# Altium PCB AirQ.PcbDoc
Units mm, origin at the board's own origin, x right, y up, seen from the top; angles counter-clockwise.
Board outline 40 x 27 mm, 2 copper layers (Top Layer, Bottom Layer); 53 components, 41 nets, 204 pads, 58 vias.
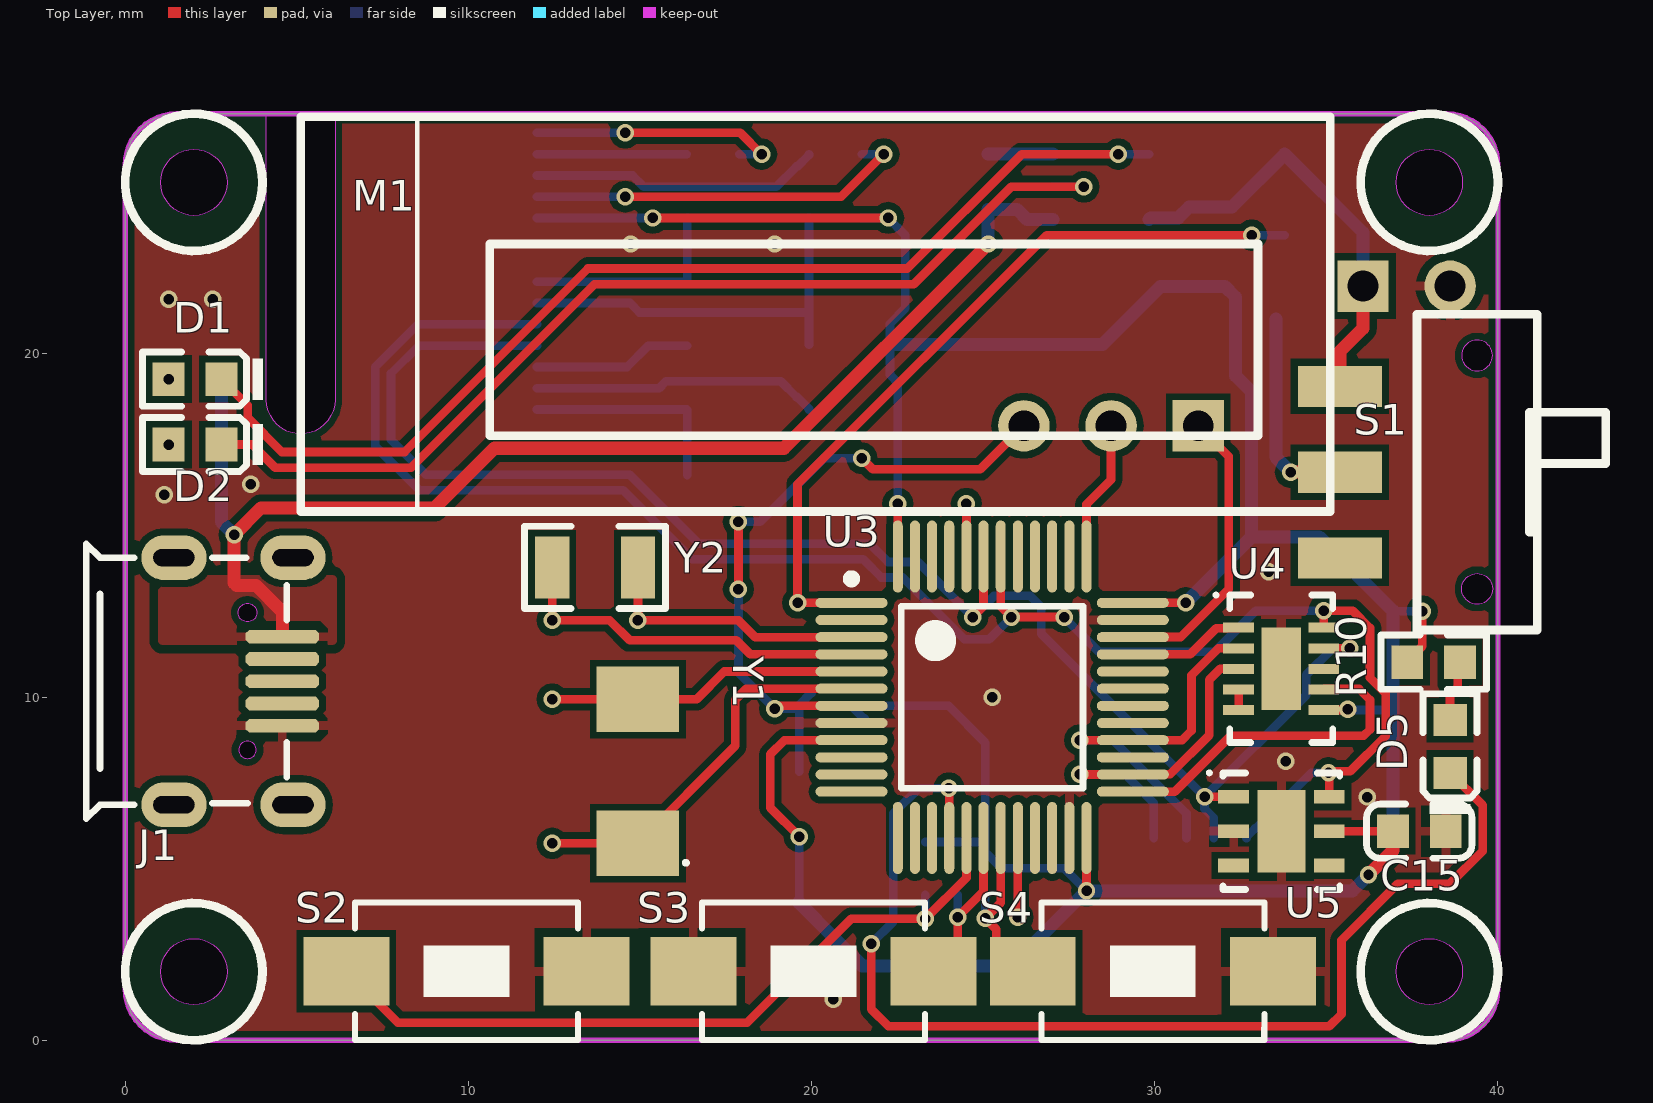
[diagram p0: Top Layer view]
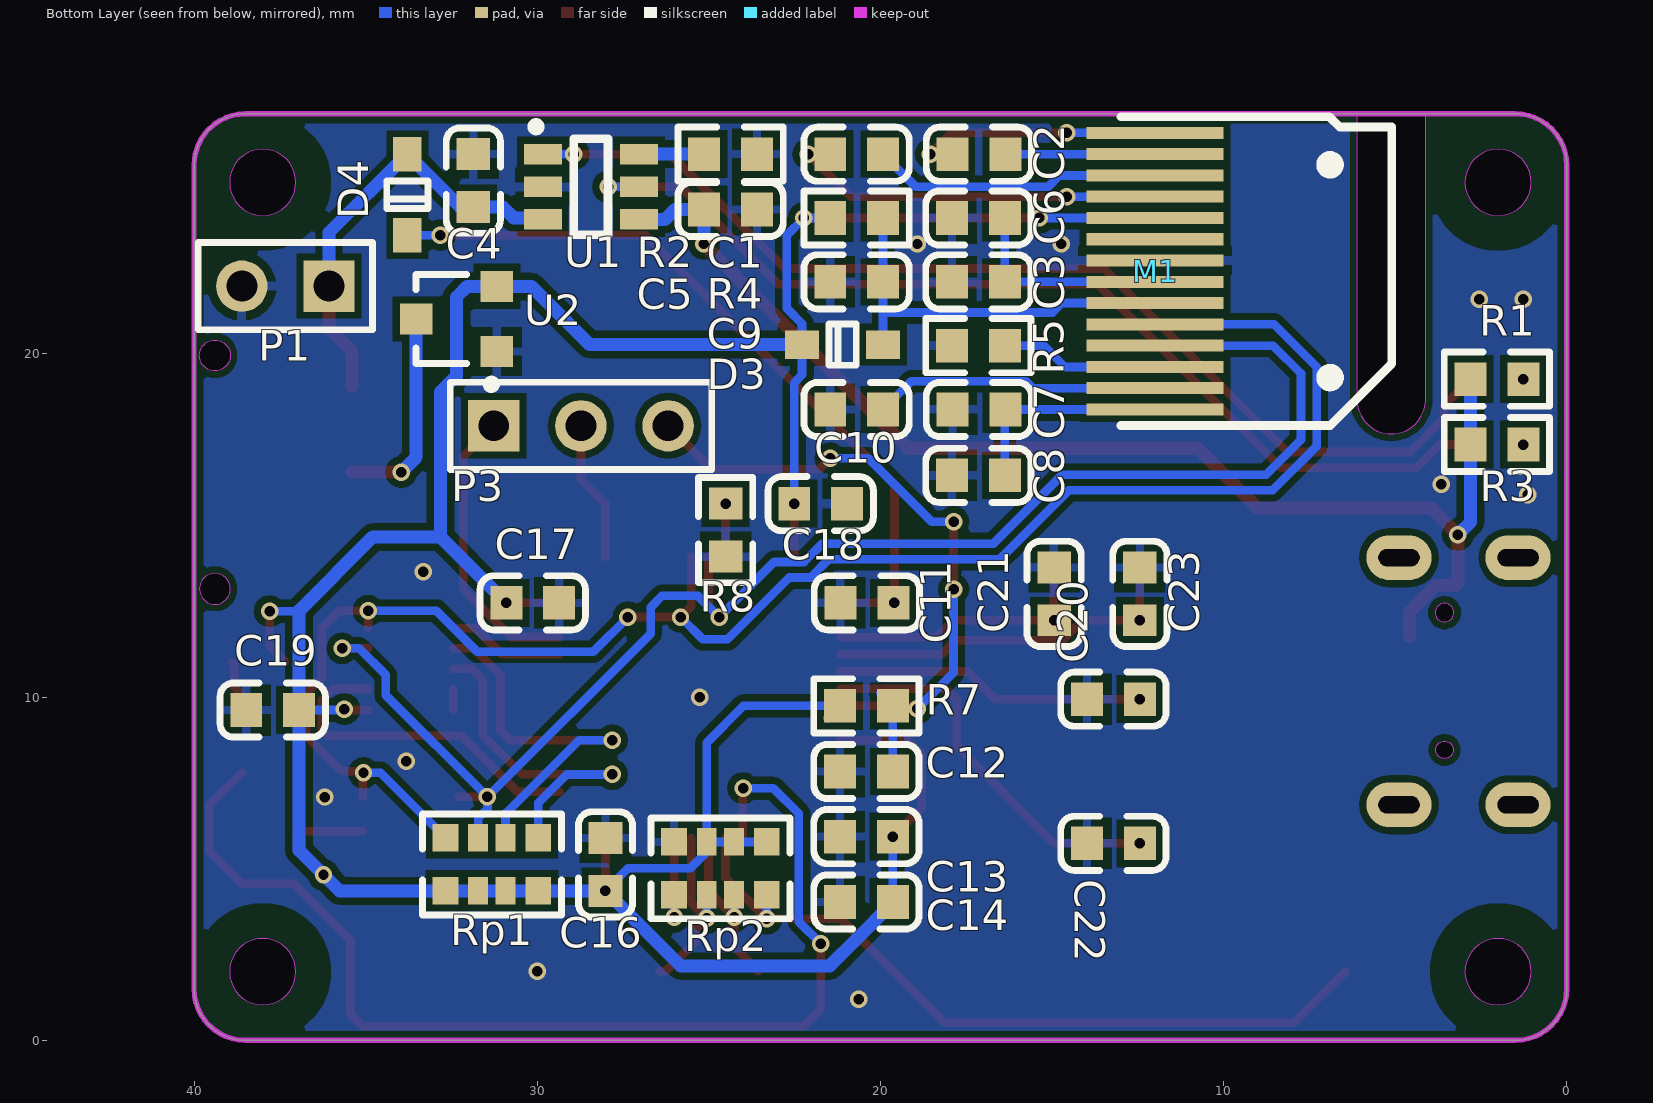
[diagram p1: Bottom Layer view, seen from below]
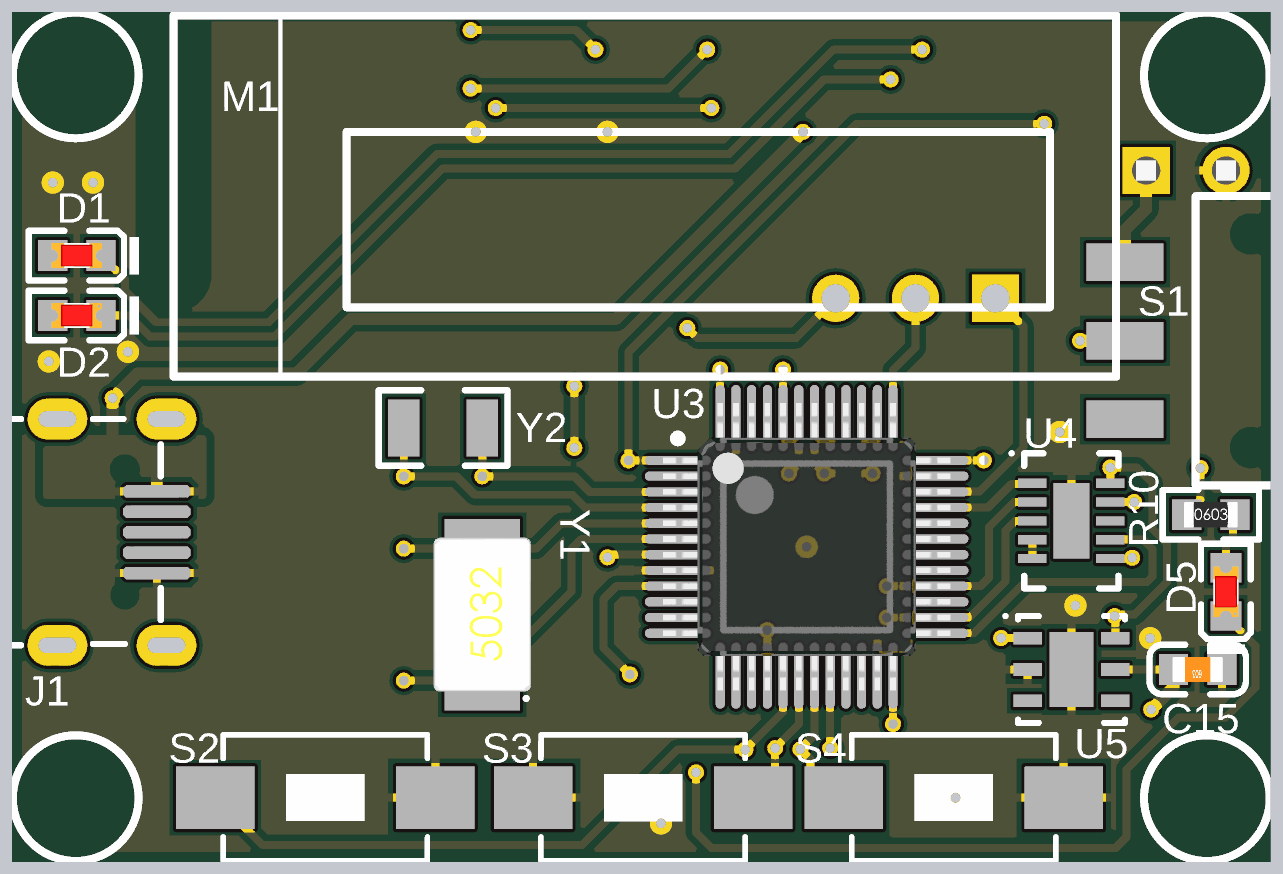
[diagram p2: 3D render of the assembled board from above, using the file's embedded part models]
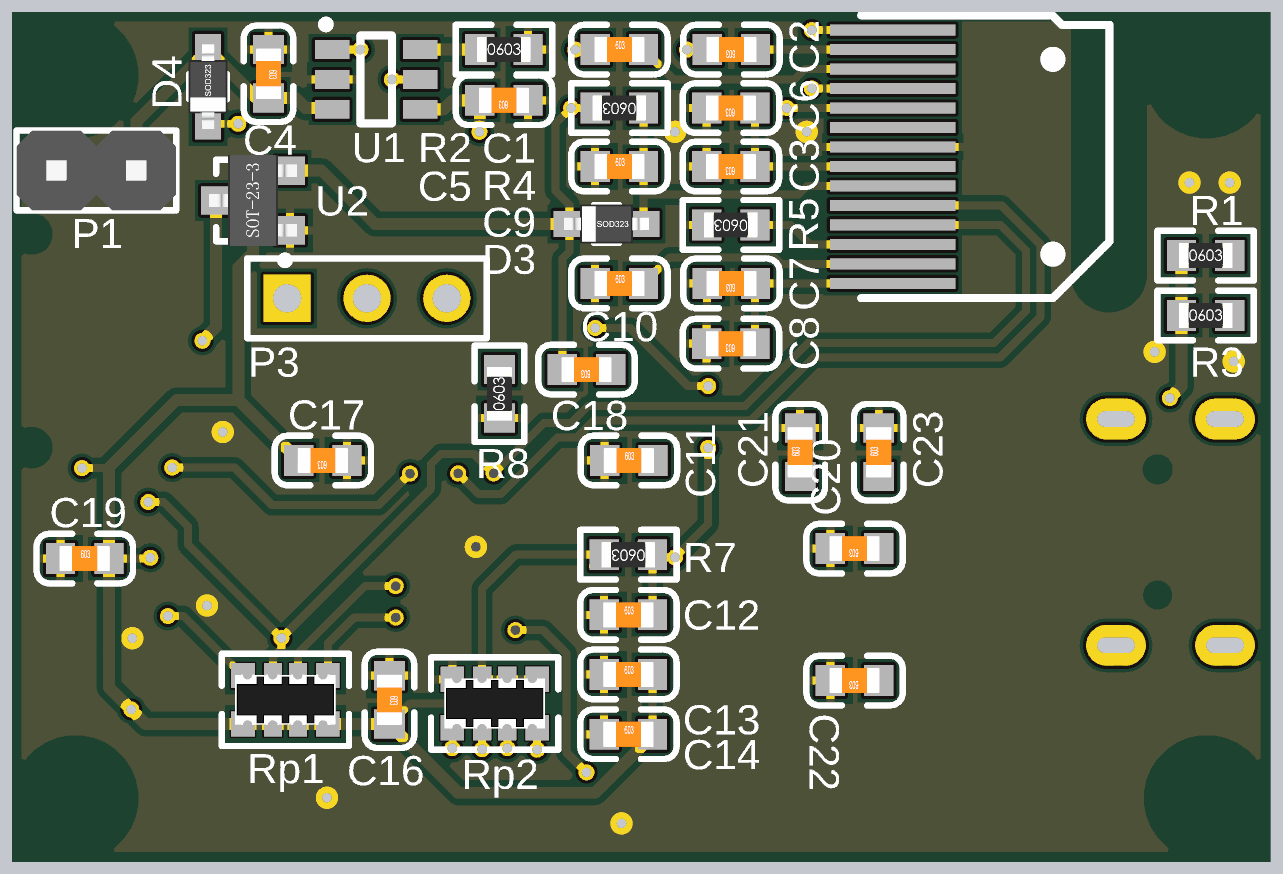
[diagram p3: 3D render of the assembled board from below, using the file's embedded part models]

## Layer stack, top to bottom
Top Solder: solder mask 0.0102, Solder Resist, Dk 3.5
Top Layer: signal copper 0.0356
Dielectric 1: dielectric 0.32, FR-4, Dk 4.8
Bottom Layer: signal copper 0.0356
Bottom Solder: solder mask 0.0102, Solder Resist, Dk 3.5

## Board outline
0,1.5 ccw(c1.5,1.5) 1.5,0 38.5,0 ccw(c38.5,1.5) 40,1.5 40,25.5 ccw(c38.5,25.5) 38.5,27 1.5,27 ccw(c1.5,25.5) 0,25.5
cut-out: 38,1.034 cw(c38,2) 37.034,2 cw(c38,2) 38,2.966 cw(c38,2) 38.966,2 cw(c38,2)
cut-out: 38,24.034 cw(c38,25) 37.034,25 cw(c38,25) 38,25.966 cw(c38,25) 38.966,25 cw(c38,25)
cut-out: 2,24.034 cw(c2,25) 1.034,25 cw(c2,25) 2,25.966 cw(c2,25) 2.966,25 cw(c2,25)
cut-out: 2,1.034 cw(c2,2) 1.034,2 cw(c2,2) 2,2.966 cw(c2,2) 2.966,2 cw(c2,2)
cut-out: 4.114,18.669 4.114,27 6.114,27 6.114,18.669 cw(c5.114,18.669)

## Design rules (kind name [scope] priority, off if disabled: settings)
Clearance "Schematic Clearance Constraint" [InComponent('J1')] p1: gap=0.203 ignorepadtopadclearanceinfootprint=FALSE
Clearance [All] p2: gap=0.203 ignorepadtopadclearanceinfootprint=FALSE
PolygonConnect PolygonConnect_VIA [IsVia] p1: connectstyle=Direct reliefconductorwidth=0.254 reliefentries=4 polygonreliefangle="90 Angle" airgapwidth=0.254
PolygonConnect [All] p2: connectstyle=Relief reliefconductorwidth=0.254 reliefentries=4 polygonreliefangle="90 Angle" airgapwidth=0.254
RoutingVias [All] p1: holewidth=0.711 width=1.27 viastyle="Through Hole" minholewidth=0.305 minwidth=0.508 maxholewidth=0.711 maxwidth=1.27
SolderMaskExpansion [All] p1: expansion=0.102
Width "Schematic Width Constraint" [InComponent('J1')] p1: maxlimit=0.762 minlimit=0.381 preferedwidth=0.508
Width [All] p2: maxlimit=0.762 minlimit=0.254 preferedwidth=0.381
30 further rules are at their usual default settings.

## Classes and differential pairs
net class Power: +5

## Components (designator, comment, footprint, x,y, rotation, side; value= is the part's Value field where it differs from the comment)
C1 "1uF (105) 10% 50V" 0603_C 20.693,25.822 r180 bottom
C2 "1uF (105) 10% 50V" 0603_C 17.129,25.822 r0 bottom
C3 "4.7uF (475) 10% 16V" 0603_C 17.145,22.102 r0 bottom
C4 "10uF (106) 10% 10V" 0603_C 31.861,25.052 r270 bottom
C5 "1uF (105) 10% 50V" 0603_C 24.368,24.209 r0 bottom
C6 "100nF (104) 10% 50V" 0603_C 17.145,23.962 r0 bottom
C7 "4.7uF (475) 10% 16V" 0603_C 17.129,18.382 r0 bottom
C8 "100nF (104) 10% 50V" 0603_C 17.145,16.462 r0 bottom
C9 "4.7uF (475) 10% 16V" 0603_C 20.693,22.102 r180 bottom
C10 "2.2uF (225) 10% 16V" 0603_C 20.693,18.382 r180 bottom
C11 "100nF (104) 10% 50V" 0603_C 20.392,12.747 r180 bottom
C12 "100nF (104) 10% 50V" 0603_C 20.408,7.834 r180 bottom
C13 "100nF (104) 10% 50V" 0603_C 20.408,5.937 r180 bottom
C14 "2.2uF (225) 10% 16V" 0603_C 20.408,4.032 r180 bottom
C15 "4.7uF (475) 10% 16V" 0603_C 37.708,6.094 r180 top
C16 "100nF (104) 10% 50V" 0603_C 28.012,5.127 r270 bottom
C17 "100nF (104) 10% 50V" 0603_C 30.132,12.747 r0 bottom
C18 "100nF (104) 10% 50V" 0603_C 21.742,15.637 r0 bottom
C19 "1uF (105) 10% 50V" 0603_C 37.708,9.624 r180 bottom
C20 "22pF (220) 5% 50V" 0603_C 13.21,9.94 r0 bottom
C21 "22pF (220) 5% 50V" 0603_C 14.94,13.009 r90 bottom
C22 "22pF (220) 5% 50V" 0603_C 13.21,5.74 r0 bottom
C23 "22pF (220) 5% 50V" 0603_C 12.44,13.009 r90 bottom
D1 "红灯 0603" 0603_LED_S1 2.037,19.265 r180 top
D2 "绿灯 0603" 0603_LED_S1 2.037,17.36 r180 top
D3 "1N4148WS T4" SOD-323 21.103,20.272 r180 bottom
D4 "1N4148WS T4" SOD-323 33.786,24.642 r90 bottom
D5 "蓝灯 0603" 0603_LED_S1 38.605,8.564 r90 top
J1 "USB_M" USB-MICRO-A01SB141B1-261 2.039,10.463 r270 top
M1 "OLED 0.91" "OLED 0.91 BOTTOM" 11.997,22.412 r0 top
P1 "Header 2" HDR2X1-2.54 36.068,21.975 r0 bottom
P3 "Header 3" HDR3X1-2.54-1 31.267,17.907 r180 bottom
R1 "10KΩ (1002) ±1%" 0603_R 2.037,19.265 r180 bottom
R2 "1.5KΩ (1501) ±1%" 0603_R 24.368,25.822 r180 bottom
R3 "10KΩ (1002) ±1%" 0603_R 2.037,17.36 r180 bottom
R4 "4.7KΩ (4701) ±1%" 0603_R 20.693,23.962 r0 bottom
R5 "560KΩ (5603) ±1%" 0603_R 17.145,20.242 r0 bottom
R7 "10KΩ (1002) ±1%" 0603_R 20.408,9.747 r0 bottom
R8 "10KΩ (1002) ±1%" 0603_R 24.512,14.867 r90 bottom
R10 "10KΩ (1002) ±1%" 0603_R 38.126,11.019 r0 top
Rp1 "10KΩ (103) ±5%" 0603_Rx4 31.322,5.127 r0 bottom
Rp2 "10KΩ (103) ±5%" 0603_Rx4 24.662,5.011 r0 bottom
S1 "SW-SPDT" SWITCH_SMT1 35.392,16.555 r0 top
S2 "SW-PB" SW_PB2_A1 10,2.013 r90 top
S3 "SW-PB" SW_PB2_A1 20,2.013 r270 top
S4 "SW-PB" SW_PB2_A1 30,2.013 r90 top
U1 "TP4057" SOT-23-6 28.435,24.872 r0 bottom
U2 "662K" SOT23-3 32.353,21.019 r90 bottom
U3 "STM32F103C" LQFP-48 25.261,9.997 r0 top
U4 "CCS811" CCS811 33.685,10.824 r0 top
U5 "HDC1080" HDC1080 33.69,6.094 r0 top
Y1 "XTAL" "5032 - 2Pin" 14.94,7.84 r90 top value=8M
Y2 "32.768KHz ±20ppm 12.5pF" "SMD-3215_2P FC - 135" 13.69,13.779 r0 top

## Footprints (in the part's own frame and the unit in brackets; to place one, negate y for a bottom-side part, rotate by r counter-clockwise, add the part's x,y. Pads: shape width x height; smd on the part's side, far side on the other; paste and mask are expansions set on the pad)
0603_C [mm]
  rect 0.93x0.98 smd: 1(-0.77,0) 2(0.77,0)
  silkscreen extent -1.53,-0.79 1.54,0.79, body extent -0.8,-0.4 0.8,0.4, height 0.3
0603_LED_S1 [mm]
  rect 0.93x0.98 smd: A(0.77,0) K(-0.77,0)
  silkscreen extent -1.98,-0.79 1.54,0.79, body extent -0.8,-0.4 0.8,0.4, height 0.6
0603_R [mm]
  rect 0.93x0.98 smd: 1(-0.77,0) 2(0.77,0)
  silkscreen extent -1.53,-0.79 1.54,0.79, body extent -0.85,-0.4 0.85,0.4, height 0.56
0603_Rx4 [mm]
  rect 0.75x0.8 smd mask+0.051: 1(-1.35,-0.77) 4(1.35,-0.77) 5(1.35,0.77) 8(-1.35,0.77)
  rect 0.58x0.8 smd mask+0.051: 2(-0.4,-0.77) 3(0.4,-0.77) 6(0.4,0.77) 7(-0.4,0.77)
  silkscreen extent -2.02,-1.47 2.02,1.47, body extent -1.6,-0.8 1.6,0.8, height 0.55
"5032 - 2Pin" [mm] "无源晶振"
  rect 1.9x2.4 smd: 1(-2.1,0) 2(2.1,0)
  silkscreen extent -2.72,-1.45 -2.62,-1.35, body extent -2.45,-1.55 2.45,1.55, height 0.85
CCS811 [mm] "空气质量传感器"
  rect 0.9x0.292 smd: 1(-1.24,1.2) 2(-1.24,0.6) 3(-1.24,0) 4(-1.24,-0.6) 5(-1.24,-1.2) 6(1.24,-1.2) 7(1.24,-0.6) 8(1.24,0) 9(1.24,0.6) 10(1.24,1.2)
  rect 1.143x2.4 smd: 11(0,0)
  silkscreen extent -1.95,-2.15 1.5,2.2, body extent -1.35,-2 1.35,2, height 1.1
HDC1080 [mm] "温湿度传感器"
  rect 0.9x0.4 smd: 1(-1.395,1) 2(-1.395,0) 3(-1.395,-1) 4(1.395,-1) 5(1.395,0) 6(1.395,1)
  rect 1.397x2.4 smd: 7(0,0)
  silkscreen extent -2.15,-1.7 1.7,1.75, body extent -1.55,-1.55 1.55,1.55, height 0.8
HDR2X1-2.54 [mm] "2.54单排针排座"
  rect 1.5x1.5 hole 0.9: 1(0,0)
  round 1.5 hole 0.9: 2(2.54,0)
  silkscreen extent -1.27,-1.27 3.81,1.27, body extent -1.27,-1.27 3.81,1.27, height 8.54
HDR3X1-2.54-1 [mm] "2.54单排针排座"
  rect 1.5x1.5 hole 0.9: 1(0,0)
  round 1.5 hole 0.9: 2(2.54,0) 3(5.08,0)
  silkscreen extent -1.27,-1.27 6.35,1.27
LQFP-48 [mm] "LQFP"
  oval 2.1x0.292 smd: 1(-4.1,2.75) 2(-4.1,2.25) 3(-4.1,1.75) 4(-4.1,1.25) 5(-4.1,0.75) 6(-4.1,0.25) 7(-4.1,-0.25) 8(-4.1,-0.75) 9(-4.1,-1.25) 10(-4.1,-1.75) 11(-4.1,-2.25) 12(-4.1,-2.75) 25(4.1,-2.75) 26(4.1,-2.25) 27(4.1,-1.75) 28(4.1,-1.25) 29(4.1,-0.75) 30(4.1,-0.25) 31(4.1,0.25) 32(4.1,0.75) 33(4.1,1.25) 34(4.1,1.75) 35(4.1,2.25) 36(4.1,2.75)
  oval 0.292x2.1 smd: 13(-2.75,-4.1) 14(-2.25,-4.1) 15(-1.75,-4.1) 16(-1.25,-4.1) 17(-0.75,-4.1) 18(-0.25,-4.1) 19(0.25,-4.1) 20(0.75,-4.1) 21(1.25,-4.1) 22(1.75,-4.1) 23(2.25,-4.1) 24(2.75,-4.1) 37(2.75,4.1) 38(2.25,4.1) 39(1.75,4.1) 40(1.25,4.1) 41(0.75,4.1) 42(0.25,4.1) 43(-0.25,4.1) 44(-0.75,4.1) 45(-1.25,4.1) 46(-1.75,4.1) 47(-2.25,4.1) 48(-2.75,4.1)
  silkscreen extent -4.22,-2.65 2.65,3.57, body extent -4.57,-4.57 4.57,4.57, height 1.62
"OLED 0.91 BOTTOM" [mm] "0.91寸OLED,反面焊盘"
  rect 4x0.35 smd far side: 1(0,4.03) 2(0,3.41) 3(0,2.79) 4(0,2.17) 5(0,1.55) 6(0,0.93) 7(0,0.31) 8(0,-0.31) 9(0,-0.93) 10(0,-1.55) 11(0,-2.17) 12(0,-2.79) 13(0,-3.41) 14(0,-4.03)
  silkscreen extent -6.88,-7 23.12,4.5, body extent -7.24,-7 23.12,4.5, height 0.25
"SMD-3215_2P FC - 135" [mm]
  rect 1x1.8 smd: 1(-1.25,0) 2(1.25,0)
  silkscreen extent -2.05,-1.2 2.05,1.2
SOD-323 [mm]
  rect 1x0.83 smd: 1(1.18,0) 2(-1.18,0)
  silkscreen extent -0.4,-0.6 0.4,0.6, body extent -1.35,-0.63 1.35,0.63, height 1.1
SOT23-3 [mm]
  rect 0.9x0.95 smd: 1(-0.95,-1.175) 2(0.95,-1.175) 3(0,1.175)
  silkscreen extent -2.03,-1.14 1.3,1.18, body extent -1.45,-1.4 1.45,1.4, height 1.2
SOT-23-6 [mm]
  rect 1.1x0.6 smd: 1(1.4,-0.95) 2(1.4,0) 3(1.4,0.95) 4(-1.4,0.95) 5(-1.4,0) 6(-1.4,-0.95)
  silkscreen extent -0.5,-1.87 1.73,1.4
SW_PB2_A1 [mm]
  rect 2x2.5 smd: 1(0,3.556) 2(0,-3.444)
  silkscreen extent -2,-3.19 2,3.31, body extent -1.93,-3.94 1.92,3.95, height 2.5
SWITCH_SMT1 [mm] "拨动开关 9*3.5*3.5mm 3脚2档 柄长2MM 侧面贴片"
  rect 2.45x1.2 smd: 1(0,-2.5) 2(0,0) 3(0,2.5)
  Keep-Out Layer board cut-out: 3.55,-3.4 3.584,-3.228 3.682,-3.082 3.828,-2.984 4,-2.95 4,-2.95 4.172,-2.984 4.318,-3.082 4.416,-3.228 4.45,-3.4 4.45,-3.4 4.416,-3.572 4.318,-3.718 4.172,-3.816 4,-3.85 4,-3.85 3.828,-3.816 3.682,-3.718 3.584,-3.572 3.55,-3.4
  Keep-Out Layer board cut-out: 3.55,3.4 3.584,3.228 3.682,3.082 3.828,2.984 4,2.95 4,2.95 4.172,2.984 4.318,3.082 4.416,3.228 4.45,3.4 4.45,3.4 4.416,3.572 4.318,3.718 4.172,3.816 4,3.85 4,3.85 3.828,3.816 3.682,3.718 3.584,3.572 3.55,3.4
  silkscreen extent 2.25,-4.6 7.75,4.6, body extent 0.05,-4.6 5.75,4.6, height 3.5
USB-MICRO-A01SB141B1-261 [mm] "Micro 5P插座 四脚插 7.2有柱 长针有卷边 插板USB母座 编带"
  oct 0.4x2.15 smd: 1(-1.3,2.54) 2(-0.65,2.54) 3(0,2.54) 4(0.65,2.54) 5(1.3,2.54)
  oval 1.3x1.9 hole 0.5 slot 1.2 at 90 deg: 6(3.6,-0.62) 7(3.6,2.85) 8(-3.6,-0.62) 9(-3.6,2.85)
  Keep-Out Layer board cut-out: -2,1.253 -2.104,1.273 -2.192,1.332 -2.251,1.42 -2.271,1.524 -2.271,1.524 -2.251,1.628 -2.192,1.716 -2.104,1.775 -2,1.795 -2,1.795 -1.896,1.775 -1.808,1.716 -1.749,1.628 -1.729,1.524 -1.729,1.524 -1.749,1.42 -1.808,1.332 -1.896,1.273 -2,1.253
  Keep-Out Layer board cut-out: 1.746,1.524 1.765,1.427 1.82,1.344 1.903,1.289 2,1.27 2,1.27 2.097,1.289 2.18,1.344 2.235,1.427 2.254,1.524 2.254,1.524 2.235,1.621 2.18,1.704 2.097,1.759 2,1.778 2,1.778 1.903,1.759 1.82,1.704 1.765,1.621 1.746,1.524
  silkscreen extent -4,-3.18 4,2.67

## Part data
C1 C2 C5 C19: library part "0603 1uF (105) 10% 50V", "贴片电容", Package=0603, SuppliersPartNumber=C15849, ComponentLink1Description=供应商, ComponentLink1URL=http://www.szlcsc.com/product/details_16531.html, Supplier=LC
C3 C7 C9 C15: library part "0603 4.7uF (475) 10% 16V", "贴片电容", Package=0603, SuppliersPartNumber=C19666, ComponentLink1Description=供应商, ComponentLink1URL=http://www.szlcsc.com/product/details_20375.html, Supplier=LC
C4: library part "0603 10uF (106) 10% 10V", "贴片电容", Package=0603, SuppliersPartNumber=C19702, ComponentLink1Description=供应商, ComponentLink1URL=http://www.szlcsc.com/product/details_20411.html, Supplier=LC
C6 C8 C11 C12 C13 C16 C17 C18: library part "0603 100nF (104) 10% 50V", "贴片电容", Package=0603, SuppliersPartNumber=C14663, ComponentLink1Description=供应商, ComponentLink1URL=http://www.szlcsc.com/product/details_15331.html, Supplier=LC
C10 C14: library part "0603 2.2uF (225) 10% 16V", "贴片电容", Package=0603, SuppliersPartNumber=C23630, ComponentLink1Description=供应商, ComponentLink1URL=http://www.szlcsc.com/product/details_24366.html, Supplier=LC
C20 C21 C22 C23: library part "0603 22pF (220) 5% 50V", "贴片电容", Package=0603, SuppliersPartNumber=C1653, ComponentLink1Description=供应商, ComponentLink1URL=http://www.szlcsc.com/product/details_2005.html, Supplier=LC
D1: library part "0603 红灯", "发光二极管", Package=0603, SuppliersPartNumber=C2286, ComponentLink1Description=供应商, ComponentLink1URL=http://www.szlcsc.com/product/details_2659.html, Supplier=LC
D2: library part "0603 绿灯", "发光二极管", Package=0603, SuppliersPartNumber=C72043, ComponentLink1Description=供应商, ComponentLink1URL=http://www.szlcsc.com/product/details_73152.html, Supplier=LC
D3 D4: library part "SOD-323 1N4148WS T4", "二极管", Package=SOD-323, SuppliersPartNumber=C2128, ComponentLink1Description=供应商, ComponentLink1URL=http://www.szlcsc.com/product/details_2485.html, Supplier=LC
D5: library part "0603 蓝灯", "发光二极管", Package=0603, SuppliersPartNumber=C72041, ComponentLink1Description=供应商, ComponentLink1URL=http://www.szlcsc.com/product/details_73150.html, Supplier=LC
J1: "Micro/Mini USB", Rule="Width Constraint [Pref Width = 20mil    Min Width = 15mil    Max Width = 30mil]"
M1: library part OLED-0.91, "0.91寸OLED裸屏"
P1 P3: "接插件", LatestRevisionDate=17-Jul-2002, LatestRevisionNote="Re-released for DXP Platform.", Publisher="Altium Limited"
R1 R3 R7 R8 R10: library part "0603 10KΩ (1002) 1%", "贴片电阻", Package=0603, SuppliersPartNumber=C25804, ComponentLink1Description=供应商, ComponentLink1URL=http://www.szlcsc.com/product/details_26547.html, Supplier=LC
R2: library part "0603 1.5KΩ (1501) 1%", "贴片电阻", Package=0603, SuppliersPartNumber=C22843, ComponentLink1Description=供应商, ComponentLink1URL=http://www.szlcsc.com/product/details_23570.html, Supplier=LC
R4: library part "0603 4.7KΩ (4701) 1%", "贴片电阻", Package=0603, SuppliersPartNumber=C23162, ComponentLink1Description=供应商, ComponentLink1URL=http://www.szlcsc.com/product/details_23889.html, Supplier=LC
R5: library part "0603 560KΩ (5603) 1%", "贴片电阻", Package=0603, SuppliersPartNumber=C23203, ComponentLink1Description=供应商, ComponentLink1URL=http://www.szlcsc.com/product/details_23930.html, Supplier=LC
Rp1 Rp2: library part "0603*4  10KΩ (103) 5%", "贴片排阻", Package=0603*4, SuppliersPartNumber=C29718, ComponentLink1Description=供应商, ComponentLink1URL=http://www.szlcsc.com/product/details_30472.html, Supplier=LC
S1: "开关", ComponentLink1Description="Manufacturer Link", ComponentLink1URL=http://www.apem.com, DatasheetDocument=05-Dec-2000, LatestRevisionDate=17-Dec-2003, LatestRevisionNote="Schematic revised, PCB Footprint replaced.", PackageReference=TL36WW15050, Published=24-Mar-1999, Publisher="Altium Limited"
S2 S3 S4: "微动开关", LatestRevisionDate=17-Jul-2002, LatestRevisionNote="Re-released for DXP Platform.", PackageReference=SPST-2, Published=24-Mar-1999, Publisher="Altium Limited"
U1: library part TP4057_[C12044], "电池电源管理", Package=SOT-23-6, SuppliersPartNumber=C12044, ComponentLink1Description=供应商, ComponentLink1URL=http://www.szlcsc.com/product/details_12599.html, Supplier=LC
U2: library part XC6206P332MR, "3.3V稳压三极管 662K"
U3: "STM32单片机48引脚"
U4: "空气质量检测"
U5: "温湿度传感器"
Y1: "晶振", LatestRevisionDate=17-Jul-2002, LatestRevisionNote="Re-released for DXP Platform.", PackageReference=R38, Published=8-Jun-2000, Publisher="Altium Limited"
Y2: library part "SMD-3215_2P 32.768KHz 20ppm 12.5pF", "贴片晶振", Package=SMD-3215_2P, SuppliersPartNumber=C32346, ComponentLink1Description=供应商, ComponentLink1URL=http://www.szlcsc.com/product/details_33310.html, Supplier=LC

## Via types
v1: diameter 0.508, hole 0.305, Top Layer to Bottom Layer, 58 vias

## Nets (pads, with @x,y where several pads share a name; then routed paths per layer and width w, separated by ;. In a path a pad name is that pad's centre, name@x,y a point inside that pad or via, vN(x,y) a via of type N, cw(c..) or ccw(c..) an arc to the next point about the centre after c; other vN are vias at no path point)
3.3V: C13.2 C14.2 C15.2 C16.2 C17.2 C18.2 C19.2 D3.2 M1.5 R4.2 R7.2 R10.1 Rp1.5 Rp1.6 Rp1.7 Rp1.8 Rp2.1 Rp2.2 Rp2.3 U2.2 U3.9 U3.24 U3.36 U3.48 U4.6 U5.5 | length 105.2
  Top Layer w0.254: v1(15.367,23.962) v1(22.228,23.962) ; v1(19.638,5.937) 18.796,6.779 18.796,8.333 19.21,8.747 U3.9 ; U3.48 v1(22.512,15.637) ; v1(28.012,4.357) U3.24 ; U3.36 v1(30.902,12.747) ; U4.6 35.595,9.624 v1(35.622,9.65) ; U5.5 C15.2 ; R10.1 37.356,11.044 37.794,11.482 v1(37.794,12.504) v1@37.746,12.455
  Top Layer w0.381: v1(36.228,4.822) 36.938,5.532 C15.2
  Bottom Layer w0.254: M1.5 v1(15.367,23.962) ; C14.2 v1(19.638,5.937) ; R4.2 v1(22.228,23.962) 22.733,23.457 22.733,21.333 22.283,20.883 D3.2 22.283,19.394 22.512,19.165 v1(22.512,15.637) ; R7.2@21.541,9.384 21.516,9.384 21.178,9.722 R7.2 23.988,9.747 25.062,8.674 Rp2.3 ; Rp2.1 Rp2.2 Rp2.3 ; v1(28.012,4.357) 27.357,5.011 25.54,5.011 25.062,5.489 Rp2.3 ; v1(35.622,9.65) 35.648,9.624 C19.2 ; 36.938,12.521 36.955,12.504 v1(37.794,12.504)
  Bottom Layer w0.381: C14.2 19.638,4.007 20.693,2.952 ; 20.693,2.951 21.473,2.171 25.825,2.171 v1(28.012,4.357) Rp1.8 Rp1.7 Rp1.6 Rp1.5 35.763,4.357 v1(36.228,4.822) 36.938,5.532 C19.2 36.938,12.521 34.79,14.668 32.823,14.668 ; D3.2 28.473,20.272 30.169,21.969 U2.2 32.043,21.969 32.353,21.659 32.353,19.36 32.823,18.891 32.823,14.668 ; v1(30.902,12.747) 32.823,14.668
+5: C5.2 J1.1 R1.1 R3.1 U1.4 | length 37.1
  Top Layer w0.381: J1.1 4.579,12.491 3.812,13.257 3.244,13.257 3.175,13.326 v1(3.175,14.732) 3.924,15.481 3.928,15.481 3.962,15.515 9.017,15.515 10.754,17.252 19.194,17.252 v1(25.146,23.204)
  Bottom Layer w0.381: R1.1 R3.1 2.807,15.1 v1(3.175,14.732) ; C5.2@25.138,24.197 25.138,23.212 v1(25.146,23.204) ; C5.2 25.987,24.209 26.274,23.922 U1.4
BOOT0: R8.2 U3.44 | length 1.5
  Top Layer w0.254: U3.44 v1(24.512,15.637)
BOOT1: Rp2.5 U3.20 | length 3
  Top Layer w0.254: v1(26.012,3.592) U3.20
  Bottom Layer w0.254: v1(26.012,3.592) Rp2.5 Rp2.5@26.023,4.229
CCS_ADD: U3.33 U4.1 | length 3.4
  Top Layer w0.254: U3.33 31.036,11.247 31.793,12.005 32.426,12.005 U4.1
CCS_INT: Rp1.1 U3.26 U4.3 | length 10.4
  Top Layer w0.254: v1(27.813,7.747) U3.26 29.369,7.754 30.446,7.754 31.585,8.893 31.585,10.503 31.906,10.824 U4.3
  Bottom Layer w0.254: v1(27.813,7.747) 29.139,7.747 29.972,6.914 Rp1.1
CCS_RST: Rp1.2 U3.28 U4.2 | length 11.4
  Top Layer w0.254: v1(27.813,8.747) U3.28 30.792,8.747 31.071,9.026 31.071,10.636 31.859,11.424 U4.2
  Bottom Layer w0.254: v1(27.813,8.747) 28.785,8.747 30.922,6.61 Rp1.2
CCS_WAKE: U3.25 U4.7 | length 10
  Top Layer w0.254: U3.25 30.586,7.247 32.211,8.872 36.083,8.872 36.27,9.059 36.27,9.917 35.952,10.234 34.936,10.234 U4.7
CLK: P3.2 U3.37 | length 4.1
  Top Layer w0.254: U3.37 28.012,15.617 28.727,16.332 P3.2
DIO: P3.1 U3.34 | length 8.5
  Top Layer w0.254: U3.34 29.369,11.754 30.76,11.754 32.159,13.154 32.159,17.014 P3.1
GND: C3.2 C4.1 C5.1 C6.2 C7.2 C8.2 C9.1 C10.1 C11.1 C12.1 C13.1 C14.1 C15.1 C16.1 C17.1 C18.1 C19.1 C20.2 C21.2 C22.2 C23.2 J1.5 M1.7 P1.2 R2.2 R5.2 R8.1 Rp2.4 S2.2 S3.2 S4.2 U1.2 U2.1 U3.8 U3.23 U3.35 U3.47 U4.11 U5.2 U5.7
  other v1: 20.626,1.196 30,2.013 36.195,7.089 33.817,8.13 25.261,9.997 33.317,13.652 1.143,15.897 3.66,16.203 1.27,21.59 2.55,21.59 14.732,23.204 18.923,23.204
IIC1_SCL: M1.10 Rp1.4 U3.42 U4.10 U5.6 | length 52
  Top Layer w0.254: U3.42 25.512,12.647 v1(25.825,12.334) 27.354,12.334 v1(27.357,12.33) ; U4.10 v1(34.925,12.52) 35.768,12.52 36.271,12.017 36.271,10.562 36.727,10.106 36.727,8.87 35.697,7.84 35.109,7.84 v1(35.062,7.794) 35.085,7.771 U5.6
  Bottom Layer w0.254: M1.10 8.532,20.862 7.29,19.62 7.29,17.311 8.574,16.027 14.512,16.027 16.523,14.016 21.503,14.016 22.036,13.483 22.658,13.483 24.458,11.684 25.175,11.684 v1(25.825,12.334) ; v1(27.357,12.33) 28.364,11.324 31.745,11.324 32.941,12.52 v1(34.925,12.52) ; Rp1.4 32.672,5.922 32.92,6.17 32.945,6.17 34.569,7.794 v1(35.062,7.794)
IIC1_SDA: M1.11 Rp1.3 U3.43 U4.9 U5.1 | length 46.7
  Top Layer w0.254: v1(24.698,12.334) 25.012,12.647 U3.43 ; v1(31.452,7.094) U5.1 ; U4.9 v1(35.687,11.424)
  Bottom Layer w0.254: M1.11 8.558,20.242 7.747,19.431 7.747,17.5 8.763,16.484 14.701,16.484 16.712,14.473 21.693,14.473 22.225,13.941 23.091,13.941 v1(24.698,12.334) 25.319,12.954 26.363,12.954 26.694,12.623 26.694,11.852 v1(31.452,7.094) ; Rp1.3 31.722,6.477 31.452,6.747 v1(31.452,7.094) ; v1(35.687,11.424) 35.192,11.424 34.417,10.649 34.417,10.059 v1(31.452,7.094)
Key1: Rp2.8 S2.1 U3.17 | length 22.3
  Top Layer w0.254: S2.1 7.949,0.508 18.12,0.508 21.153,3.541 v1(23.312,3.541) 24.512,4.741 U3.17
  Bottom Layer w0.254: v1(23.312,3.541) Rp2.8
Key2: Rp2.7 S3.1 U3.18 | length 5.1
  Top Layer w0.254: S3.1 24.262,2.718 v1(24.262,3.592) 25.012,4.342 U3.18
  Bottom Layer w0.254: v1(24.262,3.592) Rp2.7
Key3: Rp2.6 S4.1 U3.19 | length 5.4
  Top Layer w0.254: U3.19 25.512,4.006 v1(25.062,3.556) 25.384,3.234 25.384,2.886 26.257,2.013 S4.1
  Bottom Layer w0.254: v1(25.062,3.556) Rp2.6
LED1: D5.K U3.16 | length 33.4
  Top Layer w0.254: v1(21.742,2.819) 21.742,0.908 22.243,0.406 35.087,0.406 35.442,0.761 35.442,2.919 37.085,4.561 38.597,4.561 39.553,5.517 39.553,6.845 D5.K ; v1(24.003,7.347) 24.012,7.338 U3.16
  Bottom Layer w0.254: v1(21.742,2.819) 22.38,3.457 22.38,6.607 23.119,7.347 v1(24.003,7.347)
NetC1_1: C1.1 M1.4 | length 11.2
  Top Layer w0.254: v1(14.568,24.582) 20.858,24.582 v1(22.098,25.822)
  Bottom Layer w0.254: M1.4 v1(14.568,24.582) ; C1.1 v1(22.098,25.822)
NetC1_2: C1.2 M1.3 | length 8.5
  Bottom Layer w0.254: M1.3 14.783,25.202 15.113,24.872 18.973,24.872 19.56,25.459 19.585,25.459 19.923,25.797 C1.2
NetC2_1: C2.1 M1.2 | length 4.4
  Bottom Layer w0.254: M1.2 C2.1
NetC2_2: C2.2 M1.1 | length 7.4
  Top Layer w0.254: v1(14.568,26.442) 17.922,26.442 v1(18.542,25.822)
  Bottom Layer w0.254: M1.1 v1(14.568,26.442) ; C2.2 v1(18.542,25.822)
NetC3_1: C3.1 C6.1 M1.8 | length 6.2
  Bottom Layer w0.254: M1.8 C3.1 C6.1
NetC7_1: C7.1 C8.1 M1.14 | length 6.3
  Bottom Layer w0.254: M1.14 C7.1 16.375,18.366 C8.1
NetC9_2: C9.2 D3.1 M1.9 R4.1 | length 11.7
  Bottom Layer w0.254: M1.9 14.713,21.482 14.986,21.209 19.923,21.209 ; D3.1 19.923,21.209 ; R4.1 C9.2 19.923,21.209
NetC10_2: C10.2 M1.13 | length 8.4
  Bottom Layer w0.254: M1.13 15.557,19.002 15.757,19.203 19.103,19.203 19.56,18.745 19.585,18.745 19.923,18.407 C10.2
NetC11_2: C11.2 D4.2 U3.1 | length 22.2
  Top Layer w0.254: U3.1 v1(19.592,12.747) 19.592,16.199 26.855,23.462 v1(32.823,23.462)
  Bottom Layer w0.254: v1(32.823,23.462) D4.2
NetD1_A: D1.A R1.2
  other v1: 1.267,19.265
NetD1_K: D1.K U1.1 | length 31.8
  Top Layer w0.254: D1.K 2.807,19.24 3.145,18.902 3.17,18.902 3.572,18.5 3.572,18.137 4.564,17.145 8.137,17.145 13.485,22.492 22.792,22.492 26.122,25.822 v1(28.935,25.822)
  Bottom Layer w0.254: v1@28.935,25.781 v1@28.976,25.822 ; v1(28.935,25.822) v1@28.976,25.822 ; U1.1 v1@28.976,25.822
NetD2_A: D2.A R3.2
  other v1: 1.267,17.36
NetD2_K: D2.K U1.5 | length 29.7
  Top Layer w0.254: D2.K 3.702,17.36 4.374,16.688 8.327,16.688 13.674,22.035 22.981,22.035 25.818,24.872 v1(27.935,24.872)
  Bottom Layer w0.254: U1.5 v1(27.935,24.872)
NetD5_A: D5.A R10.2 | length 1.8
  Top Layer w0.254: D5.A 38.605,10.07 38.832,10.297 38.832,10.954 R10.2
NetM1_12: M1.12 R5.1 | length 4.6
  Bottom Layer w0.254: M1.12 14.623,19.622 15.243,20.242 R5.1
NetR2_1: R2.1 U1.6 | length 1.9
  Bottom Layer w0.381: R2.1 U1.6
NetS1_2: S1.2 U2.3 | length 6.1
  Top Layer w0.381: v1(33.964,16.555) S1.2
  Bottom Layer w0.381: U2.3 33.528,16.991 v1(33.964,16.555)
NetU4_4: U4.4 U4.5 | length 0.6
  Top Layer w0.254: U4.5 U4.4
OSC32_IN: C21.1 U3.3 Y2.2 | length 8
  Top Layer w0.254: Y2.2 v1(14.94,12.239) 17.868,12.239 18.36,11.747 U3.3
OSC32_OUT: C23.1 U3.4 Y2.1 | length 10.7
  Top Layer w0.254: Y2.1 v1(12.44,12.239) 14.114,12.239 14.698,11.655 17.805,11.655 18.213,11.247 U3.4
OSC_IN: C20.1 U3.5 Y1.2 | length 9.1
  Top Layer w0.254: v1(12.44,9.94) Y1.2 16.65,9.94 17.457,10.747 U3.5
OSC_OUT: C22.1 U3.6 Y1.1 | length 11.4
  Top Layer w0.254: v1(12.44,5.74) Y1.1 17.779,8.579 17.779,9.927 18.101,10.248 U3.6 U3.6
RST: C12.2 P3.3 R7.1 U3.7 | length 21.1
  Top Layer w0.254: v1(17.868,13.147) v1(17.868,15.113) ; v1(18.923,9.664) 18.992,9.664 19.075,9.747 U3.7 ; v1(21.463,16.96) 21.786,16.637 24.917,16.637 P3.3
  Bottom Layer w0.254: v1(17.868,13.147) 17.868,10.719 v1(18.923,9.664) 19.555,9.664 R7.1 ; v1(17.868,15.113) 18.506,15.113 20.353,16.96 v1(21.463,16.96) ; C12.2 R7.1 ; R7.1@20.001,10.11 19.976,10.11 19.638,9.772 R7.1
VBAT: C4.2 D4.1 P1.1 S1.3 U1.3 | length 12.7
  Top Layer w0.381: S1.3 35.392,20.07 36.068,20.746 P1.1
  Bottom Layer w0.381: U1.3 29.878,23.966 30.688,23.966 31.005,24.282 C4.2 32.246,24.282 D4.1 36.068,23.54 P1.1
pads on no net: J1.2 J1.3 J1.4 J1.6 J1.7 J1.8 J1.9 M1.6 S1.1 U3.2 U3.10 U3.11 U3.12 U3.13 U3.14 U3.15 U3.21 U3.22 U3.27 U3.29 U3.30 U3.31 U3.32 U3.38 U3.39 U3.40 U3.41 U3.45 U3.46 U4.8 U5.3 U5.4

## Polygon pours and split planes (outlines as drawn)
GND on Top Layer "GND_L01_P003" (solid, remove dead copper, pour order 3): 0,0 40,0 40,27 0,27
+5 on Top Layer "+5_L01_P000" (solid, remove dead copper, pour order 0): 0.959,11.522 6.165,11.522 6.165,13.554 0.959,13.554
GND on Bottom Layer "GND_L02_P001" (solid, pour order 1): 0,0 40,0 40,27 0,27

## Keep-outs
Keep-Out Layer:
  the board outline again, w0.152

## Other copper
Top Layer:
  pour cut-out: 38,0 cw(c38,2) 36,2 cw(c38,2) 38,4 cw(c38,2) 40,2 cw(c38,2)
  pour cut-out: 38,23 cw(c38,25) 36,25 cw(c38,25) 38,27 cw(c38,25) 40,25 cw(c38,25)
  pour cut-out: 2,23 cw(c2,25) 0,25 cw(c2,25) 2,27 cw(c2,25) 4,25 cw(c2,25)
  pour cut-out: 2,0 cw(c2,2) 0,2 cw(c2,2) 2,4 cw(c2,2) 4,2 cw(c2,2)
  pour cut-out: 6.039,11.268 ccw(c6.038,11.648) 6.419,11.649 6.419,12.538 6.165,12.538 6.165,11.649 cw(c6.038,11.649) 6.038,11.522 1.085,11.522 cw(c1.085,11.648) 0.959,11.648 0.959,13.428 cw(c1.085,13.428) 1.085,13.554 6.039,13.554 cw(c6.039,13.428) 6.165,13.428 6.165,12.538 6.419,12.538 6.419,13.428 ccw(c6.038,13.428) 6.038,13.809 1.085,13.809 ccw(c1.085,13.428) 0.704,13.428 0.704,11.65 ccw(c1.085,11.648) 1.085,11.267
Bottom Layer:
  pour cut-out: 38,0 cw(c38,2) 36,2 cw(c38,2) 38,4 cw(c38,2) 40,2 cw(c38,2)
  pour cut-out: 38,23 cw(c38,25) 36,25 cw(c38,25) 38,27 cw(c38,25) 40,25 cw(c38,25)
  pour cut-out: 2,23 cw(c2,25) 0,25 cw(c2,25) 2,27 cw(c2,25) 4,25 cw(c2,25)
  pour cut-out: 2,0 cw(c2,2) 0,2 cw(c2,2) 2,4 cw(c2,2) 4,2 cw(c2,2)

## Silkscreen, mask and mechanical layers (free items; w line width, h text height)
Top Overlay:
  circle w0.254: c38,2 r2
  circle w0.254: c38,25 r2
  circle w0.254: c2,25 r2
  circle w0.254: c2,2 r2
Mechanical 1:
  circle w0.254: c38,2 r1
  circle w0.254: c38,25 r1
  circle w0.254: c2,25 r1
  circle w0.254: c2,2 r1
  lines w0.254: 4.114,18.669 ccw(c5.114,18.669) 6.114,18.669 6.114,27 4.114,27 4.114,18.669

## Dimensions
0,25.5 to 40,25.5 on Mechanical 13
1.5,27 to 1.5,0 on Mechanical 13